# Altium PCB NFC.PcbDoc
Units mil, origin at the board's own origin, x right, y up, seen from the top; angles counter-clockwise.
Board outline 3370.62 x 2126.61 mil, 2 copper layers (Top Layer, Bottom Layer); 8 components, 7 nets, 23 pads, 2 vias.
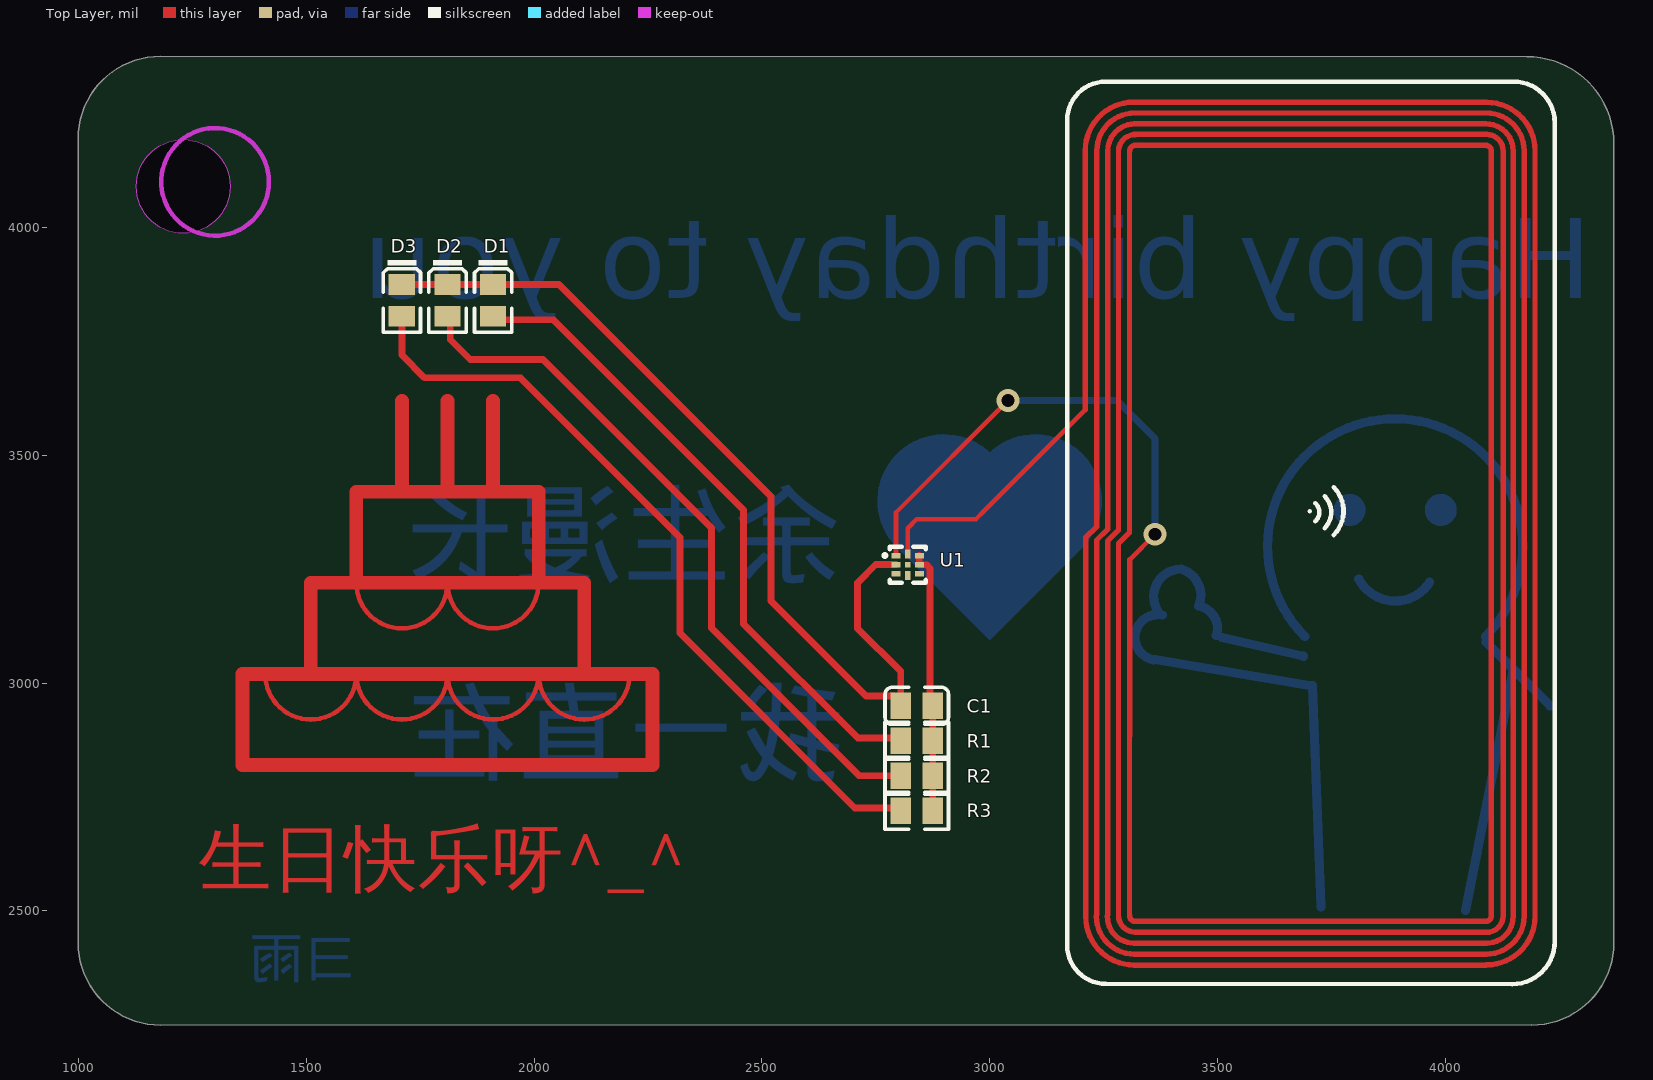
[diagram p0: Top Layer view]
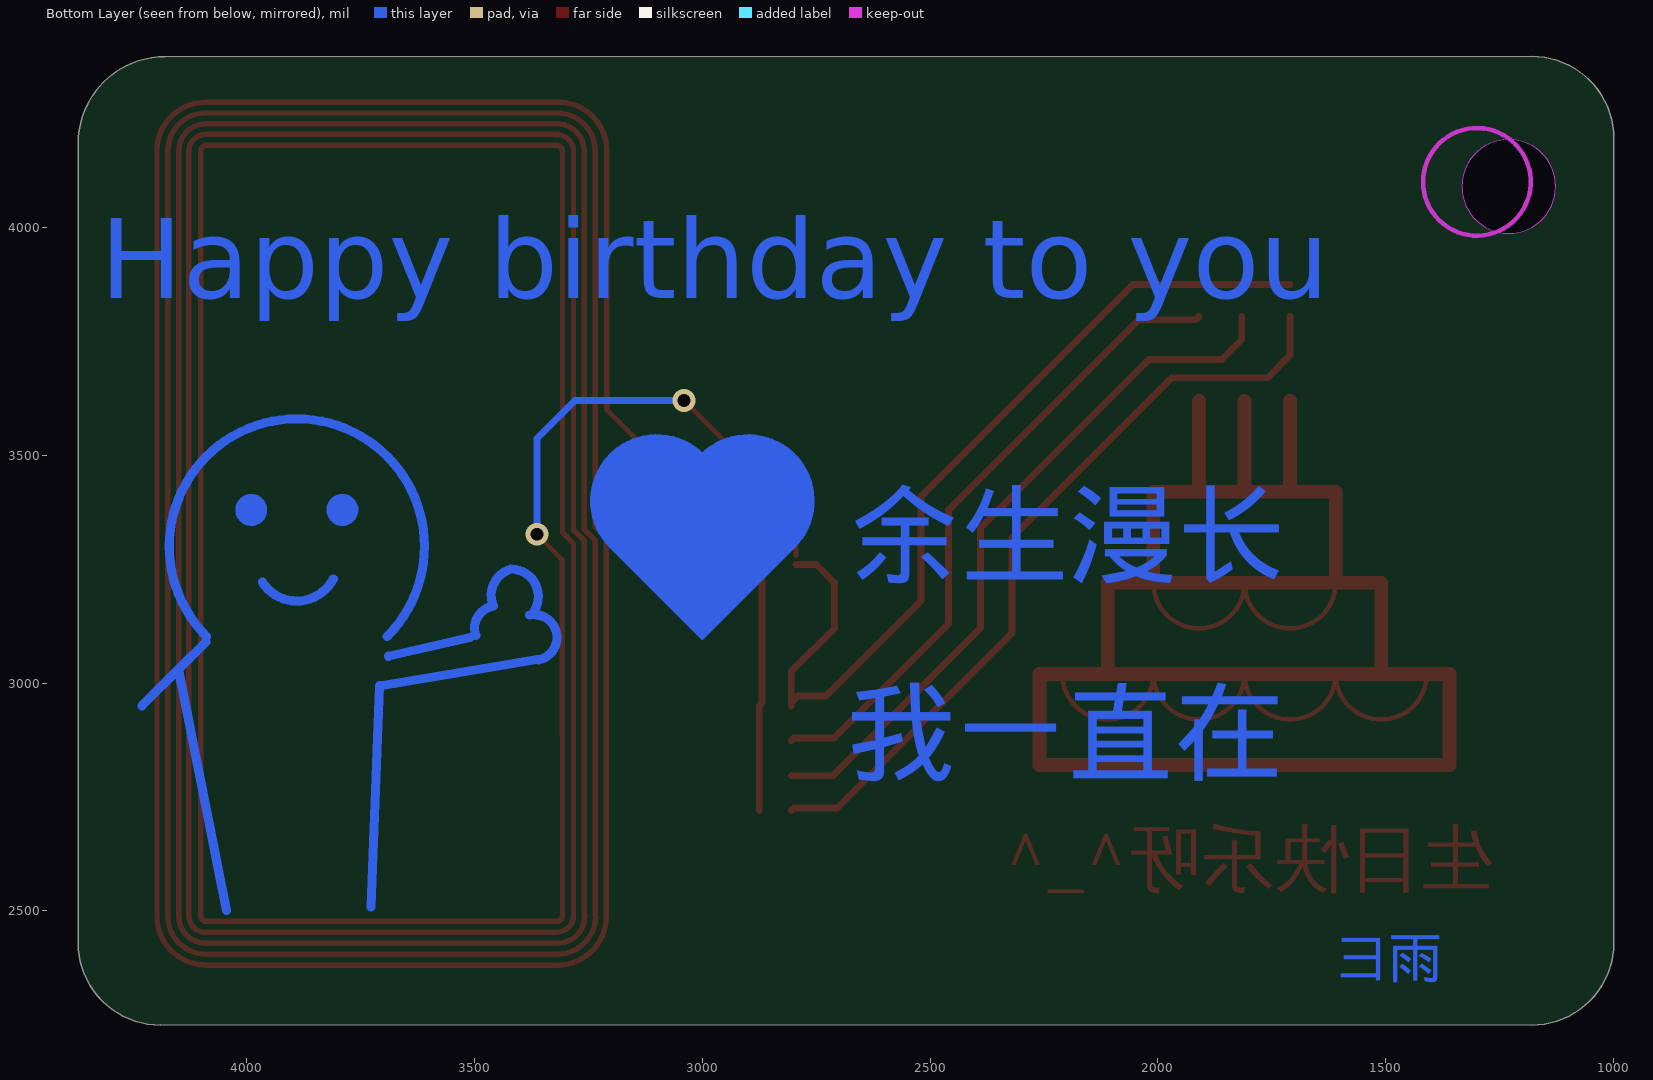
[diagram p1: Bottom Layer view, seen from below]
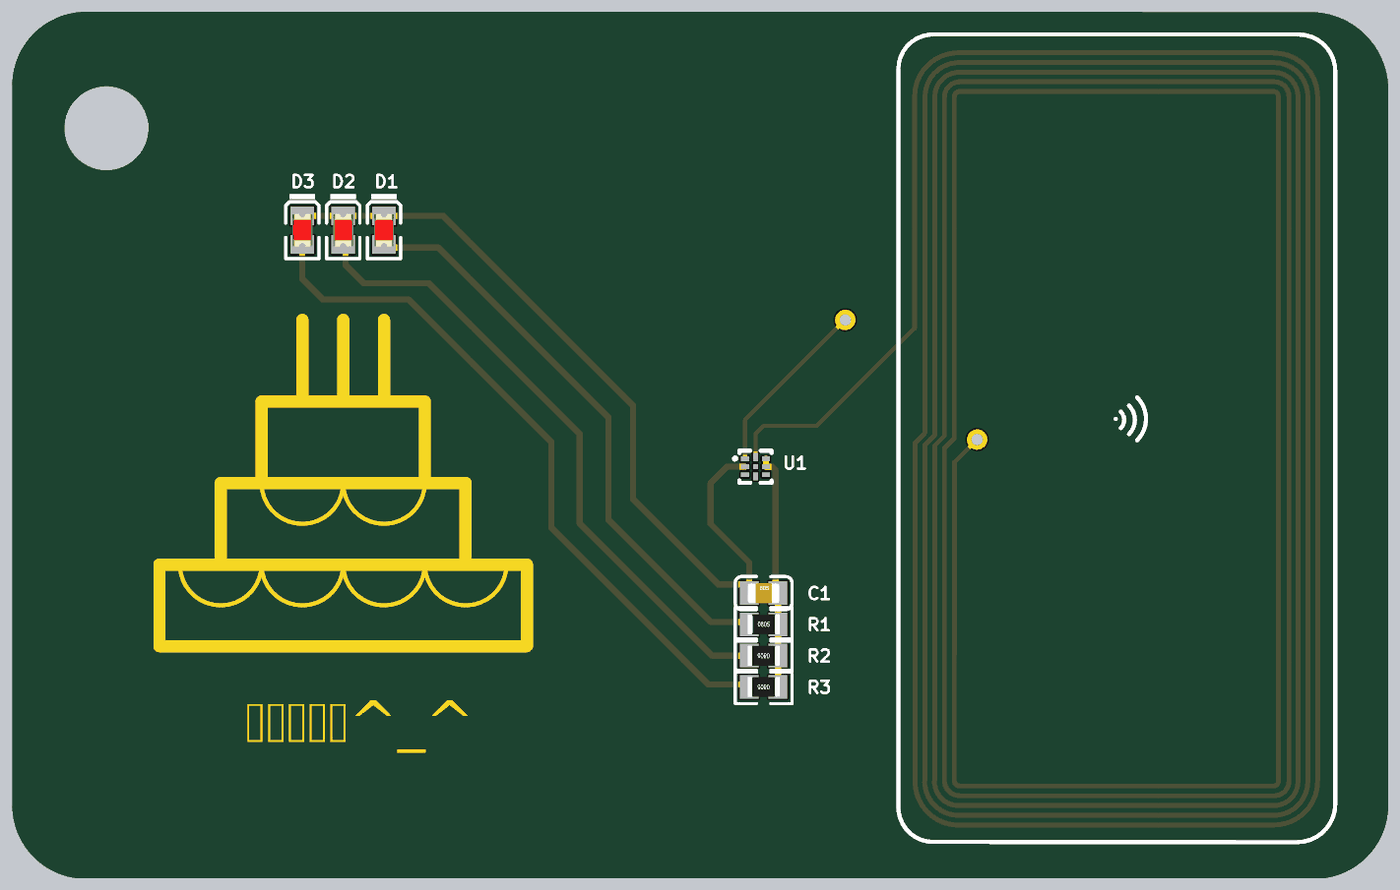
[diagram p2: 3D render of the assembled board from above, using the file's embedded part models]

## Layer stack, top to bottom
Top Solder: solder mask 0.4, Solder Resist, Dk 3.5
Top Layer: signal copper 1.4
Dielectric 1: dielectric 12.6, FR-4, Dk 4.8
Bottom Layer: signal copper 1.4
Bottom Solder: solder mask 0.4, Solder Resist, Dk 3.5

## Board outline
1180,2249.38 cw(c1180,2430) 999.38,2430 1000,2430 1000,4195 999.38,4195 cw(c1180,4195) 1180,4375.62 1180,4375.98 4179.12,4374.91 cw(c4179.12,4184.03) 4370,4184.03 4370,2430 cw(c4189.38,2430) 4189.38,2249.38 4189.38,2250
cut-out: 1230,3986.92 cw(c1230,4090) 1126.92,4090 cw(c1230,4090) 1230,4193.08 cw(c1230,4090) 1333.08,4090 cw(c1230,4090)

## Design rules (kind name [scope] priority, off if disabled: settings)
Clearance [All] p1: gap=6 ignorepadtopadclearanceinfootprint=FALSE except(0: Arc-Hole Track-Hole SMDPad-Hole THPad-Hole Via-Hole Fill-Hole Poly-Hole Region-Hole Text-Hole)
HoleToHoleClearance [All] p1: gap=0 allowstackedmicrovias=TRUE
MinimumSolderMaskSliver [All] p1: minsoldermaskwidth=0
PolygonConnect [All] p1: connectstyle=Relief reliefconductorwidth=10 reliefentries=4 polygonreliefangle="90 Angle" airgapwidth=10
RoutingVias [All] p1: holewidth=28 width=50 viastyle="Through Hole" minholewidth=28 minwidth=50 maxholewidth=28 maxwidth=50
SilkToSilkClearance [All] p1: silktosilkclearance=0
SilkToSolderMaskClearance [IsPad] p1: minsilkscreentomaskgap=0 clearancetoexposedcopper=TRUE
SolderMaskExpansion [All] p1: expansion=4 istentingtop=FALSE
Width [All] p1: maxlimit=100 minlimit=10 preferedwidth=10
26 further rules are at their usual default settings.

## Components (designator, comment, footprint, x,y, rotation, side; value= is the part's Value field where it differs from the comment)
C1 "220nF (224) 10% 50V" 0805_C 2840,2950 r0 top
D1 "翠绿 0805" 0805_LED_S1 1910,3840 r270 top
D2 "翠绿 0805" 0805_LED_S1 1810,3840 r270 top
D3 "翠绿 0805" 0805_LED_S1 1710,3840 r270 top
R1 "47Ω (47R0) ±1%" 0805_R 2840,2873.33 r0 top
R2 "47Ω (47R0) ±1%" 0805_R 2840,2796.67 r180 top
R3 "47Ω (47R0) ±1%" 0805_R 2840,2720 r180 top
U1 "NT3H1101W0FHKH" XQFN-8_L1.6-W1.6-P0.50-BR 2820,3260 r180 top

## Footprints (in the part's own frame and the unit in brackets; to place one, negate y for a bottom-side part, rotate by r counter-clockwise, add the part's x,y. Pads: shape width x height; smd on the part's side, far side on the other; paste and mask are expansions set on the pad)
0805_C [mm]
  rect 1.16x1.47 smd: 1(-0.89,0) 2(0.89,0)
  silkscreen extent -1.77,-1.04 1.77,1.04, body extent -1,-0.62 1,0.63, height 0.77
0805_LED_S1 [mm]
  rect 1.16x1.47 smd: A(0.89,0) K(-0.89,0)
  silkscreen extent -2.25,-1.04 1.77,1.03, body extent -1.01,-0.62 1.01,0.62, height 1.1
0805_R [mm]
  rect 1.16x1.47 smd: 1(-0.89,0) 2(0.89,0)
  silkscreen extent -1.77,-1.04 1.77,1.03, body extent -1,-0.62 1,0.63, height 0.49
XQFN-8_L1.6-W1.6-P0.50-BR [mm]
  rect 0.5x0.3 smd: 1(0.65,-0.5) 2(0.65,0) 3(0.65,0.5) 5(-0.65,0.5) 6(-0.65,0) 7(-0.65,-0.5)
  rect 0.3x0.5 smd: 4(0,0.6) 8(0,-0.6)
  rect 0.3x0.3 smd: 9(0,0)
  silkscreen extent -1,-1 1.33,1

## Part data
C1: library part "0805 220nF (224) 10% 50V", "贴片电容", Package=0805, SuppliersPartNumber=C5378, ComponentLink1Description=供应商链接, ComponentLink1URL=http://www.szlcsc.com/product/details_5810.html, Supplier=LC
D1 D2 D3: library part "0805 翠绿", "发光二极管", Package=0805, SuppliersPartNumber=C2297, ComponentLink1Description=供应商链接, ComponentLink1URL=http://www.szlcsc.com/product/details_2670.html, Supplier=LC
R1 R2 R3: library part "0805 47Ω (47R0) 1%", "贴片电阻", Package=0805, SuppliersPartNumber=C17714, ComponentLink1Description=供应商链接, ComponentLink1URL=http://www.szlcsc.com/product/details_18402.html, Supplier=LC
U1: "NFC芯片"

## Via types
v1: diameter 50, hole 28, Top Layer to Bottom Layer, 2 vias

## Nets (pads, with @x,y where several pads share a name; then routed paths per layer and width w, separated by ;. In a path a pad name is that pad's centre, name@x,y a point inside that pad or via, vN(x,y) a via of type N, cw(c..) or ccw(c..) an arc to the next point about the centre after c; other vN are vias at no path point)
GND: C1.1 D1.K D2.K D3.K U1.2 | length 2026.7
  Top Layer w15: D3.K D2.K D1.K 2054.96,3875.04 2520,3410 2520,3180 2728.56,2971.44 2789.63,2971.44 2804.96,2956.1 C1.1 2804.96,3025.04 2710,3120 2710,3220 2750.01,3260.01 U1.2
LA: U1.1 | length 4353
  Top Layer w10: U1.1 2794.41,3374.41 v1(3040,3620) ; 3307.35,3271 v1(3363,3326.65)
  Top Layer w11.81: 3306.85,2491 3307.35,3271 ; 3307.35,2489 ccw(c3319.35,2489) 3319.35,2477 4089,2477 ccw(c4089,2489) 4101,2489 ; 4101,2491 4101,4168.17
  Bottom Layer w15: v1(3040,3620) 3280,3620 3363,3537 v1(3363,3326.65)
LB: U1.8 | length 214.7
  Top Layer w10: U1.8 2820,3340 2840,3360 2970,3360
NetD1_A: D1.A R1.1 | length 1427.3
  Top Layer w15: D1.A 1917.61,3797.35 2042.65,3797.35 2460,3380 2460,3130 2710.56,2879.44 2798.86,2879.44 R1.1
NetD2_A: D2.A R2.2 | length 1565.3
  Top Layer w15: D2.A@1816.1,3804.96 1816.1,3753.9 1860,3710 2020,3710 2389.46,3340.54 2389.46,3120.54 2713.33,2796.67 R2.2
NetD3_A: D3.A R3.2 | length 1717.1
  Top Layer w15: D3.A 1710,3720 1760,3670 1970,3670 2320,3320 2320,3110 2703.9,2726.1 2798.86,2726.1 R3.2
VCC: C1.2 R1.2 R2.1 R3.1 U1.6 U1.7 | length 580.8
  Top Layer w15: U1.7 U1.6 2845.86,3259.72 2861.02,3259.72 2868.93,3251.81 2868.93,2956.11 C1.2 R1.2 R2.1 R3.1
pads on no net: U1.3 U1.4 U1.5 U1.9
copper on no net: | length 44009.1
  Top Layer w10: 1410,3020 ccw(c1510,3020) 1510,2920 ccw(c1510,3020) 1610,3020 ccw(c1710,3020) 1710,2920 ccw(c1710,3020) 1810,3020 ccw(c1910,3020) 1910,2920 ccw(c1910,3020) 2010,3020 ccw(c2110,3020) 2110,2920 ccw(c2110,3020) 2210,3020 ; 1610,3220 ccw(c1710,3220) 1710,3120 ccw(c1710,3220) 1810,3220 ccw(c1910,3220) 1910,3120 ccw(c1910,3220) 2010,3220 ; 2970,3360 2987.28,3377.28 3209.85,3599.85
  Top Layer w11.81: 3209.85,3599.85 3209.85,4168.67 cw(c3316.35,4168.67) 3316.35,4275.17 ; 3210.85,2487.5 ccw(c3317.35,2487.5) 3317.35,2381 4089,2381 ; 3210.85,2491 3210.85,3306 3210.85,3319 3234.85,3343 3234.85,3356 3234.85,4168.17 ; 3234.35,2488 ccw(c3317.35,2488) 3317.35,2405 4089,2405 ; 3234.85,2491 3234.85,3306 3234.85,3313.44 3258.85,3337.44 3258.85,3356 3258.85,4168.17 ; 3235.35,4168.17 cw(c3318.35,4168.17) 3318.35,4251.17 4089,4251.17 ; 3258.35,2488 ccw(c3317.35,2488) 3317.35,2429 4089,2429 ; 3258.85,2491 3258.85,3306 3258.85,3311.56 3282.85,3335.56 3282.85,3348.56 3282.85,3356 3282.85,4167.17 cw(c3319.35,4167.17) 3319.35,4203.67 ; 3259.35,4168.17 cw(c3318.35,4168.17) 3318.35,4227.17 ; 3282.85,2490 ccw(c3319.57,2490) 3319.57,2453.28 ; 3282.85,2491 3282.85,3306 3306.85,3330 3306.85,3343 3306.85,3356 3306.85,4168.17 ; 3307.35,4168.17 cw(c3319.35,4168.17) 3319.35,4180.17 4089,4180.17 cw(c4089,4168.17) 4101,4168.17 ; 3317.35,4204.17 3319.35,4204.17 4089,4204.17 ; 3317.35,4227.33 3318.35,4227.33 4089,4227.33 ; 3317.35,4275.17 4089,4275.17 ; 3319.57,2453 4089,2453 ; 4090,2405 ccw(c4090,2488) 4173,2488 ; 4090,2429 ccw(c4090,2488) 4149,2488 ; 4090,4227.17 cw(c4090,4168.17) 4149,4168.17 4149,2491 ; 4090,4251.17 cw(c4090,4168.17) 4173,4168.17 4173,2491 ; 4090.5,2381.5 ccw(c4090.5,2488) 4197,2488 ; 4090.5,4274.67 cw(c4090.5,4168.17) 4197,4168.17 4197,2491 ; 4091,2453 ccw(c4091,2489) 4127,2489 ; 4091,4204.17 cw(c4091,4168.17) 4127,4168.17 4127,2491
  Top Layer w30: 1710,3620 1710,3420 ; 1810,3620 1810,3420 ; 1910,3620 1910,3420 ; 1510,3020 1410,3020 1360,3020 1360,2820 2260,2820 2260,3020 2110,3020 ; 1510,3020 1610,3020 2110,3020 ; 1510,3020 1510,3220 1610,3220 ; 1610,3220 2010,3220 ; 1610,3220 1610,3420 1710,3420 ; 1710,3420 1810,3420 ; 1810,3420 1910,3420 ; 1910,3420 2010,3420 2010,3220 ; 2010,3220 2110,3220 2110,3020
  Bottom Layer w10: 2800,3300 cw(c2900,3400) 3000,3500 cw(c3100,3400) 3200,3300 3000,3100 2800,3300
  Bottom Layer w20: 3465.82,3167.42 cw(c3450.01,3119.99) 3497.44,3104.18 ; 3810.08,3228.62 ccw(c3890.01,3269.99) 3965.76,3221.39 ; 3320,3110 ccw(c3369.03,3100.19) 3359.22,3051.17 cw(c3369.03,3100.19) 3320,3110 ; 3320,3110 cw(c3369.03,3100.19) 3378.83,3149.22 ccw(c3369.03,3100.19) 3320,3110 ; 3497.43,3104.19 ccw(c3450,3120) 3465.81,3167.43 cw(c3450,3120) 3497.43,3104.19 ; 3510.01,3099.99 3689.24,3058.78 ; 3510,3100 3689.23,3058.79 ; 3510,3100 3689.23,3058.79 ; 3692.02,3102 cw(c3890.01,3299.99) 4088,3102 ; 3692.01,3102.01 cw(c3890,3300) 4087.99,3102.01 ; 3692.01,3102.01 cw(c3890,3300) 4087.99,3102.01 ; 3708.26,2994.01 3727.4,2508.69 ; 3708.26,2994.01 3727.4,2508.69 ; 3708.26,2994.01 3363.03,3051.55 3708.26,2994.01 ; 3708.26,2994.01 3727.4,2508.69 ; 3708.26,2994.01 3727.4,2508.69 ; 3708.28,2994 3727.41,2508.68 ; 3708.28,2994 3727.41,2508.68 ; 3708.28,2994 3727.41,2508.68 ; 3965.75,3221.4 cw(c3890,3270) 3810.07,3228.63 ccw(c3890,3270) 3965.75,3221.4 ; 4044.24,2501.14 4150.01,3029.99 ; 4044.23,2501.15 4150,3030 ; 4044.23,2501.15 4150,3030 ; 4090.01,3089.99 4143.11,3036.89 ; 4090,3090 4143.1,3036.9 ; 4090,3090 4143.1,3036.9 ; 4143.11,3036.89 4230.01,2949.99 ; 4143.1,3036.9 4230,2950 ; 4143.1,3036.9 4230,2950 ; 3368.55,3159.13 cw(c3420,3190) 3410.14,3249.18 ccw(c3420,3190) 3368.55,3159.13 ; 3420,3250 cw(c3403.45,3192.33) 3458.73,3168.98 ccw(c3403.45,3192.33) 3420,3250
  Bottom Layer w40: 3805.01,3379.99 ccw(c3790.01,3379.99) 3805.01,3379.99 ; 3805,3380 ccw(c3790,3380) 3805,3380 ; 3805,3380 ccw(c3790,3380) 3805,3380 ; 4005.01,3379.99 ccw(c3990.01,3379.99) 4005.01,3379.99 ; 4005,3380 ccw(c3990,3380) 4005,3380 ; 4005,3380 ccw(c3990,3380) 4005,3380

## Keep-outs
Keep-Out Layer:
  circle w10: c1300,4100 r118.11

## Other copper
Top Layer:
  text "生日快乐呀^_^" at 1264.53,2520 h200
Bottom Layer:
  region: 3000,3100 2800,3300 cw(c2900,3400) 3000,3500 cw(c3100,3400) 3200,3300
  text "Happy birthday to you" at 4321.5,3788 h300
  text "余生漫长" at 2676.15,3183 h300
  text "我一直在" at 2683.15,2748 h300
  text "彐雨" at 1614.28,2325 h150

## Silkscreen, mask and mechanical layers (free items; w line width, h text height)
Top Overlay:
  lines w10: 3715,3355 ccw(c3695,3375) 3715,3395 ; 3735,3340 ccw(c3700,3375) 3735,3410 ; 3755,3325 ccw(c3702.5,3377.5) 3755,3430 ; 3170,2425 ccw(c3255.19,2425) 3255.19,2339.81 4146.96,2339.28 ccw(c4146.96,2432.62) 4240.3,2432.62 4240.3,4229.93 ccw(c4150.23,4229.93) 4150.23,4320 3254.64,4320 ccw(c3254.64,4235.36) 3170,4235.36 3170,2425 ; 3702.5,3377.5 3702.5,3377.5
Top Solder:
  lines w10: 1410,3020 ccw(c1510,3020) 1510,2920 ccw(c1510,3020) 1610,3020 ccw(c1710,3020) 1710,2920 ccw(c1710,3020) 1810,3020 ccw(c1910,3020) 1910,2920 ccw(c1910,3020) 2010,3020 ccw(c2110,3020) 2110,2920 ccw(c2110,3020) 2210,3020 ; 1610,3220 ccw(c1710,3220) 1710,3120 ccw(c1710,3220) 1810,3220 ccw(c1910,3220) 1910,3120 ccw(c1910,3220) 2010,3220
  lines w30: 1510,3020 1510,3220 2110,3220 2110,3020 ; 1610,3220 1610,3420 2010,3420 2010,3220 ; 1710,3420 1710,3620 ; 1810,3420 1810,3620 ; 1910,3420 1910,3620 ; 1360,2820 1360,3020 2260,3020 2260,2820 1360,2820
  text "生日快乐呀^_^" at 1264.53,2520 h200
Bottom Solder:
  circle w40: c3990.01,3379.99 r15
  circle w40: c3790.01,3379.99 r15
  region: 3000,3100 2800,3300 cw(c2900,3400) 3000,3500 cw(c3100,3400) 3200,3300
  lines w20: 3359.23,3051.16 cw(c3369.04,3100.18) 3320.01,3109.99 cw(c3369.04,3100.18) 3378.84,3149.21 ; 3363.04,3051.54 3708.28,2994 3727.41,2508.68 ; 3368.56,3159.12 cw(c3420.01,3189.99) 3410.15,3249.17 ; 3420.01,3249.99 cw(c3403.46,3192.32) 3458.74,3168.97 ; 3465.82,3167.42 cw(c3450.01,3119.99) 3497.44,3104.18 ; 3510.01,3099.99 3689.24,3058.78 ; 3692.02,3102 cw(c3890.01,3299.99) 4088,3102 ; 3810.08,3228.62 ccw(c3890.01,3269.99) 3965.76,3221.39 ; 4044.24,2501.14 4150.01,3029.99 ; 4090.01,3089.99 4143.11,3036.89 4230.01,2949.99
  text "Happy birthday to you" at 4321.5,3788 h300
  text "余生漫长" at 2722.47,3183 h300
  text "我一直在" at 2679.27,2748 h300
  text "彐雨" at 1614.28,2325 h150
Mechanical 1:
  circle w10: c1230,4090 r103.08
  lines w10: 999.38,2430 ccw(c1180,2430) 1180,2249.38 ; 999.38,4195 cw(c1180,4195) 1180,4375.62 ; 1000,2430 1000,4195 ; 1180,2250 4189.38,2250 ; 1180,4375.98 4179.12,4374.91 cw(c4179.12,4184.03) 4370,4184.03 4370,2430 cw(c4189.38,2430) 4189.38,2249.38